# EAGLE board MPG (EAGLE 7.2.0)
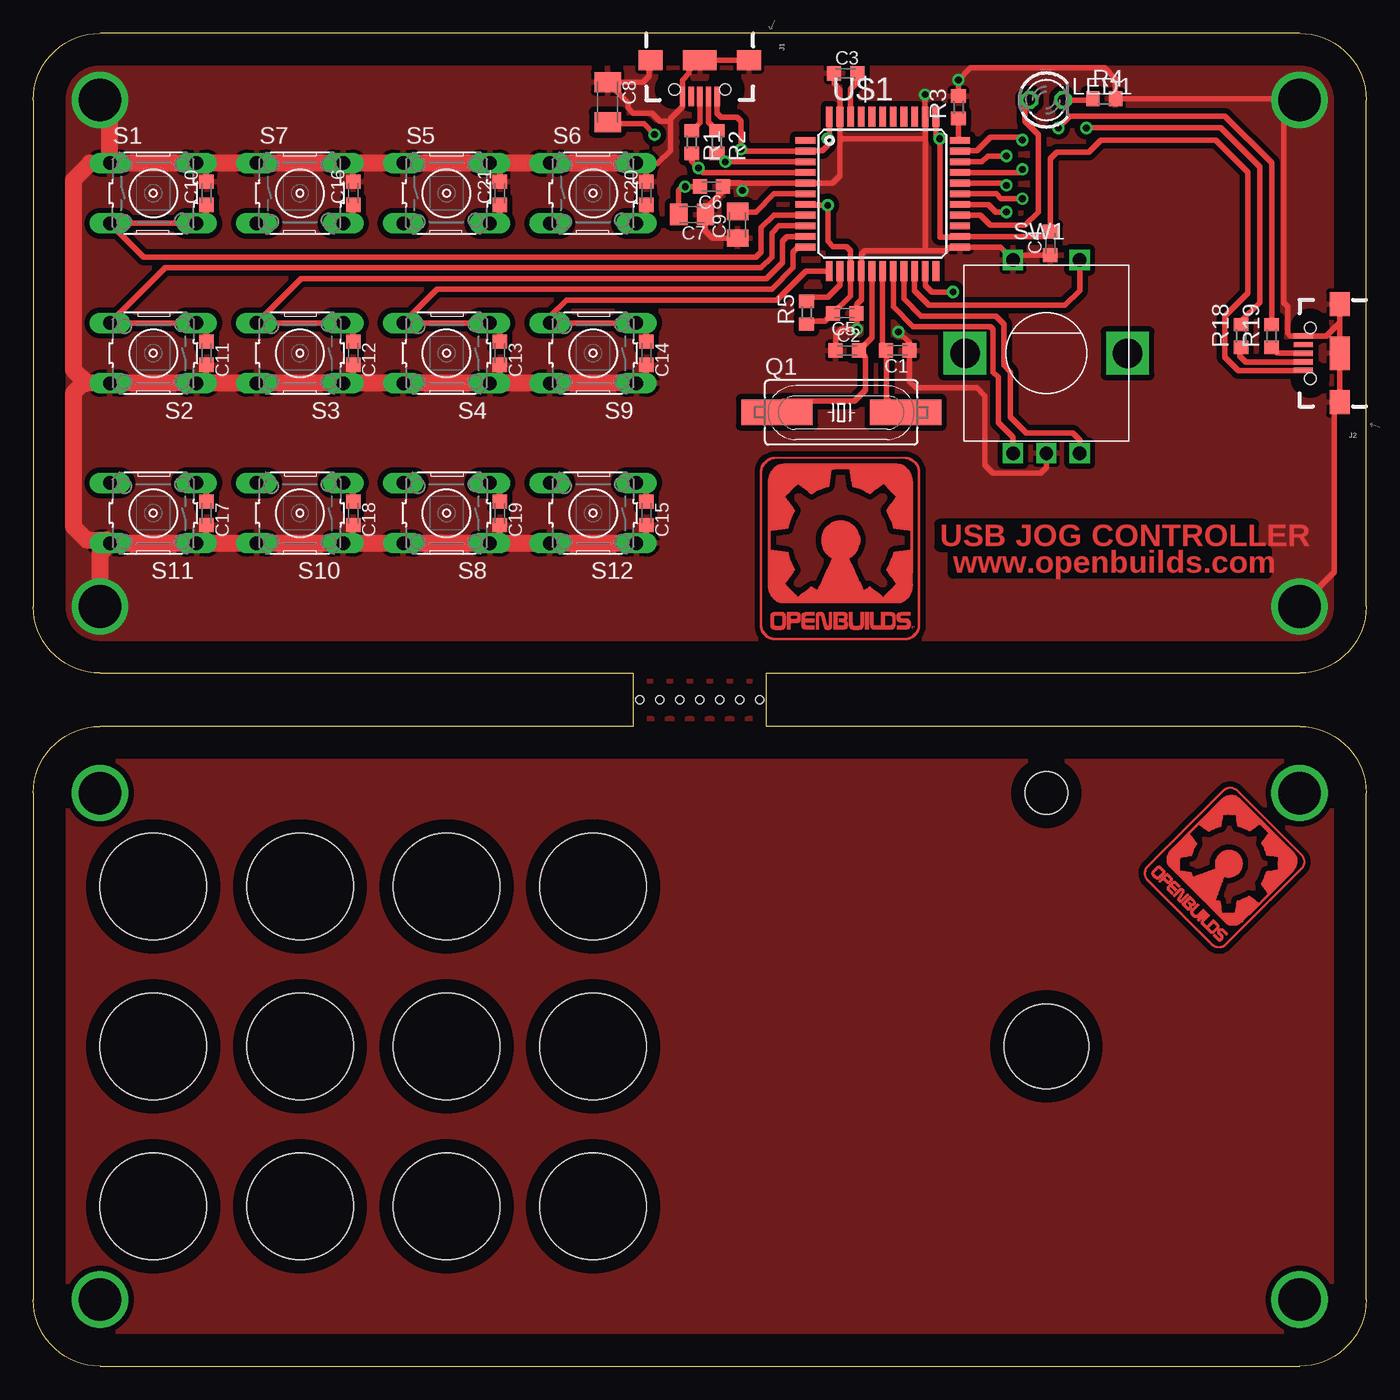
[diagram p0: board, top side]
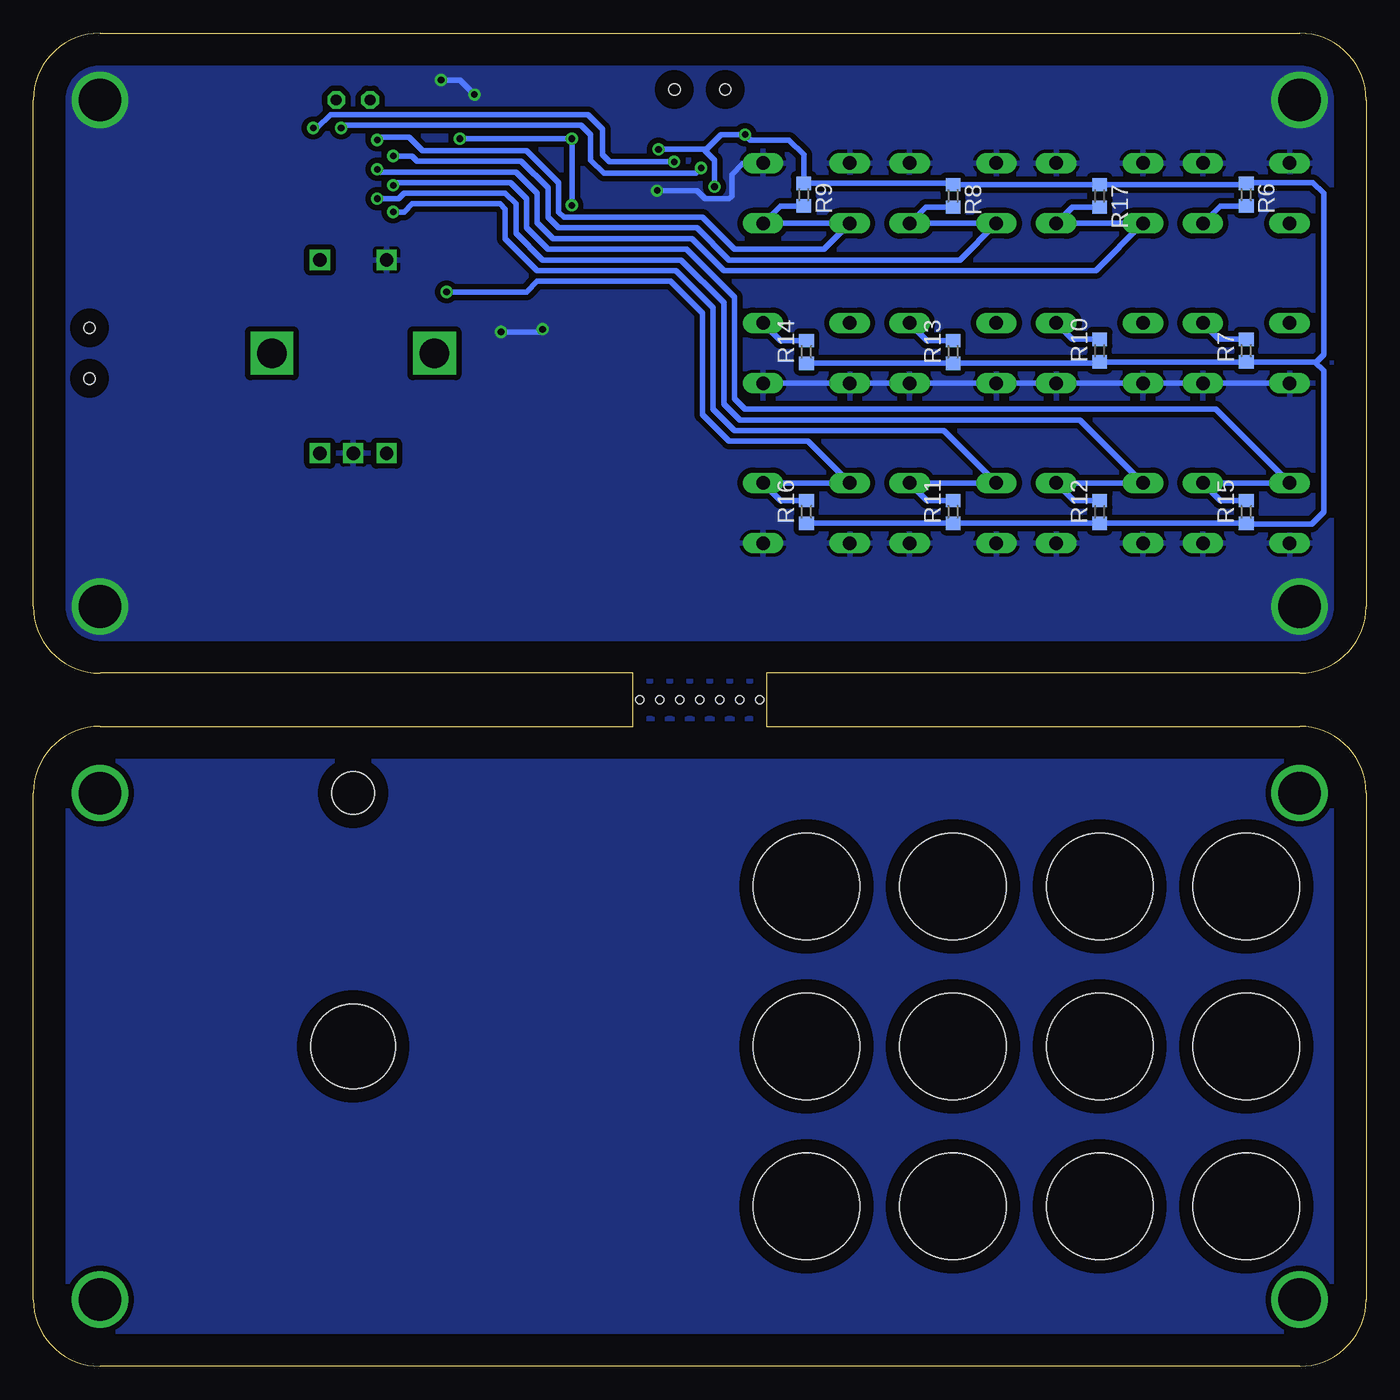
[diagram p1: board, bottom side, seen from below]

Size 100 x 100 mm. Coordinates in mm from the lower left corner, seen from the top.
Outline: 0,95 0,57 arc90 5,52 45,52 45,48 5,48 arc90 0,43 0,5 arc90 5,0 95,0 arc90 100,5 100,43 arc90 95,48 55,48 55,52 95,52 arc90 100,57 100,95 arc90 95,100 5,100 arc90 0,95
Copper layers (1*16): Top 0.035mm / dielectric 1.5mm / Bottom 0.035mm
Design rules "default": minimum track width 10mil, minimum drill 24mil, track to track 8mil, track to pad 8mil, pad to pad 8mil, via to via 8mil, smd to smd 8mil, copper to edge 40mil, drill to drill 8mil, minimum pad ring 10mil, minimum via ring 8mil, stop-mask expansion 4mil, vias tented up to drill 0mil, thermal gap 10mil
Holes 0.6 mm at 54.5,50 53,50 51.5,50 50,50 48.5,50 47,50 45.5,50
Holes 6.35 mm at 76,24
Holes 3.2 mm at 76,43
Holes 8 mm at 9,36 20,36 31,36 42,36 42,24 31,24 20,24 9,24 9,12 20,12 31,12 42,12
tKeepout: 16 lines
bKeepout: 16 lines
tRestrict: 16 lines
bRestrict: 16 lines

## Footprints (pad centres in the part's own frame; a part is rotated, then mirrored left to right if it is on the bottom)
C0603K = smd 1.05 x 1.08: 1 -0.875,0; 2 0.875,0
C0805K = smd 1.3 x 1.6: 1 -1,0; 2 1,0
C1206K = smd 1.5 x 2: 1 -1.5,0; 2 1.5,0
USB-B-MICRO-SMD_V03 = smd 1.45 x 0.4: D+ 2.725,0; D- 2.725,0.65; GND 2.725,-1.3; ID 2.725,-0.65; VBUS 2.725,1.3 | smd 1.5 x 1.8: SHIELD1 0,3.685; SHIELD2 0,-3.685 | smd 1.5 x 2.5: SHIELD3 0,0 | hole 0.85: 2.2,1.9; 2.2,-1.9
LED3MM = drill 0.813 octagon: A -1.27,0; K 1.27,0
HC49UP = smd 5.334 x 1.93: 1 -4.826,0; 2 4.826,0
R0603 = smd 1 x 1.1: 1 -0.85,0; 2 0.85,0
B3F-10XX = drill 1.016 long: 1 -3.251,2.261; 2 3.251,2.261; 3 -3.251,-2.261; 4 3.251,-2.261
ALPS_EC12E_SW = drill 1 square: A -2.5,-7.5; B 2.5,-7.5; C 0,-7.5; D -2.5,7; E 2.5,7 | drill 2.2 square: GND1 -6.1,0; GND2 6.1,0
TQFP44 = smd 1.5 x 0.5: 1 -5.8,4; 2 -5.8,3.2; 3 -5.8,2.4; 4 -5.8,1.6; 5 -5.8,0.8; 6 -5.8,0; 7 -5.8,-0.8; 8 -5.8,-1.6; 9 -5.8,-2.4; 10 -5.8,-3.2; 11 -5.8,-4; 23 5.8,-4; 24 5.8,-3.2; 25 5.8,-2.4; 26 5.8,-1.6; 27 5.8,-0.8; 28 5.8,0; 29 5.8,0.8; 30 5.8,1.6; 31 5.8,2.4; 32 5.8,3.2; 33 5.8,4 | smd 0.5 x 1.5: 12 -4,-5.8; 13 -3.2,-5.8; 14 -2.4,-5.8; 15 -1.6,-5.8; 16 -0.8,-5.8; 17 0,-5.8; 18 0.8,-5.8; 19 1.6,-5.8; 20 2.4,-5.8; 21 3.2,-5.8; 22 4,-5.8; 34 4,5.8; 35 3.2,5.8; 36 2.4,5.8; 37 1.6,5.8; 38 0.8,5.8; 39 0,5.8; 40 -0.8,5.8; 41 -1.6,5.8; 42 -2.4,5.8; 43 -3.2,5.8; 44 -4,5.8

## Placement (x,y rotation side)
C1  [C0603K]  64.84,76.21 180 top
C2  [C0603K]  61.06,76.2 0 top
C3  [C0603K]  60.95,97 0 top
C4  [C0603K]  76.3,84.24 90 top
C5  [C0603K]  60.87,79 180 top
C6  [C0603K]  50.88,88.5 180 top
C7  [C0805K]  49.43,86.41 180 top
C8  [C1206K]  43.09,94.85 270 top
C9  [C0805K]  52.84,85.63 90 top
C10  [C0603K]  13,88 90 top
C11  [C0603K]  13,76 270 top
C12  [C0603K]  24,76 270 top
C13  [C0603K]  35,76 270 top
C14  [C0603K]  46,76 270 top
C15  [C0603K]  46,64 270 top
C16  [C0603K]  24,88 90 top
C17  [C0603K]  13,64 270 top
C18  [C0603K]  24,64 270 top
C19  [C0603K]  35,64 270 top
C20  [C0603K]  46,88 90 top
C21  [C0603K]  35,88 90 top
J1  [USB-B-MICRO-SMD_V03]  50,98 270 top
J2  [USB-B-MICRO-SMD_V03]  98,76 180 top
LED1  [LED3MM]  76,95 0 top
Q1  [HC49UP]  60.62,71.56 0 top
R1  [R0603]  49.39,91.84 270 top
R2  [R0603]  51.29,91.84 270 top
R3  [R0603]  69.41,94.45 90 top
R4  [R0603]  80.34,95.09 0 top
R5  [R0603]  58.01,79.03 90 top
R6  [R0603]  9,87.9 270 bottom
R7  [R0603]  9,76.2 90 bottom
R8  [R0603]  31,87.8 270 bottom
R9  [R0603]  42.2,87.9 270 bottom
R10  [R0603]  20,76.2 90 bottom
R11  [R0603]  31,64.1 90 bottom
R12  [R0603]  20,64.1 90 bottom
R13  [R0603]  31,76.1 90 bottom
R14  [R0603]  42,76.1 90 bottom
R15  [R0603]  9,64.1 90 bottom
R16  [R0603]  42,64.1 90 bottom
R17  [R0603]  20,87.8 270 bottom
R18  [R0603]  90.6,77.3 90 top
R19  [R0603]  92.9,77.3 90 top
S1  [B3F-10XX]  9,88 0 top
S2  [B3F-10XX]  9,76 180 top
S3  [B3F-10XX]  20,76 180 top
S4  [B3F-10XX]  31,76 180 top
S5  [B3F-10XX]  31,88 0 top
S6  [B3F-10XX]  42,88 0 top
S7  [B3F-10XX]  20,88 0 top
S8  [B3F-10XX]  31,64 180 top
S9  [B3F-10XX]  42,76 180 top
S10  [B3F-10XX]  20,64 180 top
S11  [B3F-10XX]  9,64 180 top
S12  [B3F-10XX]  42,64 180 top
SW1  EC12E_SW  [ALPS_EC12E_SW]  76,76 0 top
U$1  ATMEGA32U4-AU  [TQFP44]  63.72,87.96 0 top

## Library data of the parts
C1-C6 C8 C10-C21 R1-R19 U$1 = adafruit
C7 C9 = rcl
J1 J2 = SparkFun-Connectors; PROD_ID: CONN-11752
LED1 = led
Q1 = adafruit; OC_FARNELL: unknown; OC_NEWARK: unknown
S1-S12 = switch-omron; MPN: B3F-1000; OC_FARNELL: 176432; OC_NEWARK: 36M3542
SW1 = switch-alps; MPN: EC12E2424407; OC_FARNELL: 1520813; OC_NEWARK: 74M1068

## Nets
D0: C10.1 R6.2 S1.3 S1.4 U$1.8
D1: C11.1 R7.2 S2.3 S2.4 U$1.9
D2: C12.1 R10.2 S3.3 S3.4 U$1.10
D3: C13.1 R13.2 S4.3 S4.4 U$1.11
D4PWM: C14.1 R14.2 S9.3 S9.4 U$1.12
D5PWM: SW1.A U$1.18
D6: SW1.B U$1.19
D7: SW1.E U$1.20
D8: C15.1 R16.2 S12.3 S12.4 U$1.21
D9PWM: C21.1 R8.2 S5.3 S5.4 U$1.31
D10PWM: C20.1 R9.2 S6.3 S6.4 U$1.32
D11: LED1.A U$1.26
D12: C19.1 R11.2 S8.3 S8.4 U$1.27
D13: C18.1 R12.2 S10.3 S10.4 U$1.28
D14: C17.1 R15.2 S11.3 S11.4 U$1.29
D15: C16.1 R17.2 S7.3 S7.4 U$1.30
D16: U$1.36
D17: U$1.37
D18: U$1.38
D19: U$1.39
D20: U$1.40
D21: U$1.41
D22: U$1.25
D23: U$1.22
D24: U$1.1
GND: C1.1 C2.1 C3.1 C4.1 C5.1 C6.1 C7.1 C8.1 C9.1 C10.2 C11.2 C12.2 C13.2 C14.2 C15.2 C16.2 C17.2 C18.2 C19.2 C20.2 C21.2 J1.GND J1.SHIELD1 J1.SHIELD2 J1.SHIELD3 J2.GND J2.SHIELD1 J2.SHIELD2 J2.SHIELD3 R3.2 R4.2 S1.1 S1.2 S2.1 S2.2 S3.1 S3.2 S4.1 S4.2 S5.1 S5.2 S6.1 S6.2 S7.1 S7.2 S8.1 S8.2 S9.1 S9.2 S10.1 S10.2 S11.1 S11.2 S12.1 S12.2 SW1.C SW1.D U$1.5 U$1.15 U$1.23 U$1.35 U$1.43
N$1: R1.2 R19.2 U$1.4
N$2: R2.2 R18.2 U$1.3
N$3: R3.1 U$1.33
N$7: C2.2 Q1.1 U$1.16
N$8: C1.2 Q1.2 U$1.17
N$9: R5.2 U$1.13
N$10: C3.2 U$1.42
N$11: C9.2 U$1.6
N$12: LED1.K R4.1
USBD+L: J2.D+ R19.1
USBD+T: J1.D+ R1.1
USBD-L: J2.D- R18.1
USBD-T: J1.D- R2.1
VCC: C4.2 C5.2 C6.2 C7.2 C8.2 J1.VBUS J2.VBUS R5.1 R6.1 R7.1 R8.1 R9.1 R10.1 R11.1 R12.1 R13.1 R14.1 R15.1 R16.1 R17.1 U$1.2 U$1.7 U$1.14 U$1.24 U$1.34 U$1.44

## Tracks (layer width: path | path; a pad name or v marks a point on that pad's centre or on a via)
D0
  Top 0.406: U$1.8 55.56,86.36 54.6,85.4 54.6,83.6 54.2,83.2 8.29,83.2 S1.3 S1.4 13,86.49 C10.1
  Bottom 0.406: R6.2 10.94,87.05 S1.4
D1
  Top 0.406: U$1.9 55.96,85.56 55.4,85 55.4,83.2 54.6,82.4 9.89,82.4 S2.4 S2.3 13,77.51 C11.1
  Bottom 0.406: R7.2 11.04,77.05 S2.3
D2
  Top 0.406: U$1.10 56.56,84.76 56.2,84.4 56.2,82.8 55,81.6 20.09,81.6 S3.4 S3.3 24,77.51 C12.1
  Bottom 0.406: R10.2 22.04,77.05 S3.3
D3
  Top 0.406: U$1.11 57.36,83.96 57,83.6 57,82.4 55.4,80.8 30.29,80.8 S4.4 S4.3 35,77.51 C13.1
  Bottom 0.406: R13.2 32.94,76.95 S4.3
D4PWM
  Top 0.406: U$1.12 57.96,82.16 55.8,80 40,80 38.75,78.75 S9.4 S9.3 46,77.51 C14.1
  Bottom 0.406: R14.2 43.94,76.95 S9.3
D5PWM
  Top 0.406: SW1.A 73.5,69.7 72.4,70.8 72.4,74.2 72,74.6 72,77.8 71.8,78 66,78 64.52,79.48 U$1.18
D6
  Top 0.406: SW1.B 78.5,69.5 78,70 74.5,70 73.3,71.2 73.3,74.6 72.8,75.1 72.8,78.2 72.2,78.8 66.6,78.8 65.32,80.08 U$1.19
D7
  Top 0.406: U$1.20 66.12,80.68 67.2,79.6 77.4,79.6 78.5,80.7 SW1.E
D8  (via drill 0.5)
  Top 0.406: U$1.21 66.92,81.08 67.4,80.6 v69,80.6 | C15.1 46,65.51 S12.3
  Bottom 0.406: v69,80.6 63,80.6 62.2,81.4 52.2,81.4 49.8,79 49.8,71.4 47.8,69.4 41.89,69.4 S12.4 S12.3 43.94,64.95 R16.2
D9PWM  (via drill 0.5)
  Top 0.406: U$1.31 71.16,90.36 71.6,90.8 v73,90.8 | C21.1 35,86.49 S5.4
  Bottom 0.406: v73,90.8 71.6,90.8 71.2,90.4 63.4,90.4 61.4,88.4 61.4,86.2 60.6,85.4 50.2,85.4 47.8,83 30.49,83 S5.3 S5.4 33.04,86.95 R8.2
D10PWM  (via drill 0.5)
  Top 0.406: U$1.32 69.56,91.2 70.8,91.2 71.8,92.2 74,92.2 v74.2,92 | C20.1 46,86.49 S6.4
  Bottom 0.406: v74.2,92 74,92.2 71.8,92.2 70.8,91.2 63,91.2 60.6,88.8 60.6,86.6 60.2,86.2 49.8,86.2 47.4,83.8 40.69,83.8 S6.3 S6.4 43.94,87.05 R9.2
D11
  Top 0.406: U$1.26 71.04,86.36 71.8,85.6 74.4,85.6 75.4,86.6 75.4,92.4 74.4,93.4 74.4,94.67 LED1.A
D12  (via drill 0.5)
  Top 0.406: U$1.27 71.64,87.16 72.2,86.6 v73,86.6 | C19.1 35,65.51 S8.3
  Bottom 0.406: v73,86.6 72.2,86.6 71.6,87.2 65,87.2 64.6,86.8 64.6,84.6 62.2,82.2 51.8,82.2 49,79.4 49,71.8 47.4,70.2 31.69,70.2 S8.4 S8.3 32.94,64.95 R11.2
D13  (via drill 0.5)
  Top 0.406: U$1.28 72.24,87.96 72.6,87.6 v74.2,87.6 | C18.1 24,65.51 S10.3
  Bottom 0.406: v74.2,87.6 72.6,87.6 72.2,88 64.6,88 63.8,87.2 63.8,85 61.8,83 51.4,83 48.2,79.8 48.2,72.2 47,71 21.49,71 S10.4 S10.3 21.94,64.95 R12.2
D14  (via drill 0.5)
  Top 0.406: U$1.29 72.84,88.76 v73,88.6 | C17.1 13,65.51 S11.3
  Bottom 0.406: v73,88.6 72.8,88.8 64.2,88.8 63,87.6 63,85.4 61.4,83.8 51,83.8 47.4,80.2 47.4,72.6 46.6,71.8 11.29,71.8 S11.4 S11.3 10.94,64.95 R15.2
D15  (via drill 0.5)
  Top 0.406: U$1.30 73.96,89.56 v74.2,89.8 | C16.1 24,86.49 S7.4
  Bottom 0.406: v74.2,89.8 74,89.6 63.8,89.6 62.2,88 62.2,85.8 61,84.6 50.6,84.6 48.2,82.2 20.29,82.2 S7.3 S7.4 22.04,86.95 R17.2
GND  (via drill 0.5, 3.2 pad 4)
  Top 0.406: 60.52,91.9 U$1.43 60.52,95.78 60.1,96.2 60.1,96.97 C3.1 | 60.52,91.9 60.52,89.32 59.96,88.76 U$1.5 52.02,88.76 C6.1 51.6,88.34 | 66.92,92.32 U$1.35 66.9,93.78 v66.9,95.4 | 66.92,92.32 66.9,92.1 60.72,92.1 60.52,91.9 | 66.92,92.32 66.92,83.78 66.9,83.7 | 66.9,83.7 68.5,83.7 68.7,83.9 69.46,83.9 U$1.23 72.54,83.96 SW1.D 73.86,83.36 C4.1 | 66.9,83.7 62.4,83.7 62.12,83.42 U$1.15 62.12,80.02 61.8,79.7 61.8,79.06 C5.1 61.8,78.94 v61.8,77.8 60.6,77.8 60.2,77.4 60.2,76.22 C2.1 | v64.9,77.6 65.72,76.78 C1.1 65.72,73.89 66.2,73.4 70.8,73.4 71.4,72.8 71.4,67.6 72,67 75.6,67 76,67.4 SW1.C | R3.2 v69.4,96.5 70.3,97.4 80.4,97.4 81.19,96.61 R4.2 94.91,95.09 v95,95 93.8,93.8 93.8,79.8 94.1,79.5 94.1,77.5 94.3,77.3 J2.GND 97,77.3 98,78.3 | 51.6,88.34 51.6,88 50.43,86.83 C7.1 50.4,86.38 50.4,85.2 50.97,84.63 C9.1 52.81,84.6 | 4,73.74 3.74,73.74 | 5.49,62 S11.2 | 47.8,93.4 47.8,93.6 48.7,94.5 J1.GND 48.7,96.5 49.2,97 49.2,97.2 J1.SHIELD3 J1.SHIELD1 | 47.8,93.4 47.8,91.2 46.8,90.2 45.31,90.2 S6.2 46,89.51 C20.2 | 47.8,93.4 47,93.4 46.4,94 45,94 44.6,94.4 44.6,94.8 43.09,96.31 C8.1 45.75,96.35 46.2,96.8 46.2,97.89 J1.SHIELD2 | 51.6,88.34 51.6,88.4 52,88.8 53,88.8 53,88.6 53.2,88.4 v53.2,88.2 | C10.2 13,89.51 S1.2 | C16.2 24,89.51 S7.2 | C21.2 35,89.51 S5.2 | C14.2 46,74.49 S9.1 | C13.2 35,74.49 S4.1 | C12.2 24,74.49 S3.1 | C11.2 13,74.49 S2.1 | C17.2 13,62.49 S11.1 | C18.2 24,62.49 S10.1 | C19.2 35,62.49 S8.1 | C15.2 46,62.49 S12.1 | 98,78.3 J2.SHIELD2 | 98,78.3 J2.SHIELD3 J2.SHIELD1 98,72 97.6,71.6 97.6,59.6 v95,57
  Top 1.27: S12.1 S12.2 S8.1 S8.2 S10.1 S10.2 S11.1 S11.2 5,60.99 v5,57 | S6.2 S6.1 S5.2 S5.1 S7.2 S7.1 S1.2 S1.1 | S1.1 v5.75,94.25 | S9.1 4,73.74 3,74.74 3,89 4.26,90.26 S1.1 | 3.74,73.74 3,73 3,63 4,62 5.49,62
  Bottom 0.406: v64.9,77.6 62,77.6 v61.8,77.8 | v69.4,96.5 68,96.5 v66.9,95.4 | S9.1 S9.2 S4.1 S4.2 S3.1 S3.2 S2.1 S2.2 | v53.2,88.2 50.2,88.2 49.6,87.6 47.8,87.6 47.6,87.8 47.6,89.4 46.8,90.2 45.31,90.2 S6.2
  Bottom 1.27: v5.75,94.25 v5,95
  pour Top (isolate 0.406): 1,96 4,99 96,99 99,96 99,56 96,53 55,53 55,47 96,47 99,44 99,4 96,1 4,1 1,4 1,44 4,47 45,47 45,53 4,53 1,56
  pour Bottom (isolate 0.406): 1,96 4,99 96,99 99,96 99,56 96,53 55,53 55,47 96,47 99,44 99,4 96,1 4,1 1,4 1,44 4,47 45,47 45,53 4,53 1,56
N$1  (via drill 0.5)
  Top 0.406: R1.2 49.39,90.41 v49.9,89.9 50.24,89.56 U$1.4 | R19.2 92.9,90.3 89.4,93.8 77.8,93.8 v76.9,92.9
  Bottom 0.406: v49.9,89.9 50.3,89.5 57.2,89.5 58.2,90.5 58.2,92.4 58.9,93.1 76.7,93.1 v76.9,92.9
N$2  (via drill 0.5)
  Top 0.406: U$1.3 v51.92,90.36 R2.2 | R18.2 90.6,78.4 92,79.8 92,90 89.1,92.9 v79,92.9
  Bottom 0.406: v51.92,90.36 56.76,90.36 57.3,90.9 57.3,92.8 58.4,93.9 77.7,93.9 78.7,92.9 v79,92.9
N$3
  Top 0.406: 69.76,91.96 U$1.33 69.41,92.07 R3.1
N$7
  Top 0.406: Q1.1 56.23,72.4 61.6,72.4 62.44,73.23 62.44,75.7 C2.2 62.92,77.19 U$1.16
N$8
  Top 0.406: Q1.2 64.97,71.64 64.56,72.04 64,72.6 64,76.17 C1.2 63.72,76.45 U$1.17
N$9
  Top 0.406: U$1.13 60.52,81.12 59.6,80.2 58.33,80.2 R5.2
N$10
  Top 0.406: U$1.42 61.32,95.82 61.7,96.2 61.7,96.88 C3.2
N$11
  Top 0.406: U$1.6 55.56,87.96 54.2,86.6 52.87,86.6 C9.2
N$12
  Top 0.406: LED1.K 79.4,95 R4.1
N$14  (via drill 3.2 pad 4)
  other vias: 5,43
N$15  (via drill 3.2 pad 4)
  other vias: 5,5
N$16  (via drill 3.2 pad 4)
  other vias: 95,5
N$17  (via drill 3.2 pad 4)
  other vias: 95,43
USBD+L
  Top 0.406: J2.D+ 93.35,76 R19.1
USBD+T
  Top 0.406: J1.D+ 50,93.3 R1.1
USBD-L
  Top 0.406: J2.D- 90.95,75.35 90.5,75.8 90.5,76.35 R18.1
USBD-T
  Top 0.406: J1.D- 50.65,93.33 R2.1
VCC  (via drill 0.5)
  Top 0.406: U$1.7 57.98,87.1 v59.6,87.1 59.6,84.4 60,84 61,84 61.3,83.7 61.32,83.12 U$1.14 61.3,82.14 61.3,80.3 C5.2 59.4,78.4 58.23,78.4 R5.1 | U$1.34 67.72,92.32 v68,92.1 68,84.7 69.46,84.7 U$1.24 75.94,84.76 C4.2 76.3,90.6 76.8,91.1 79.2,91.1 80.1,92 88.7,92 91.1,89.6 91.1,80.5 89.4,78.8 89.4,75.7 90.4,74.7 J2.VBUS | U$1.44 59.72,92.22 v59.6,92.1 59.6,91.6 59.2,91.2 57.96,91.2 U$1.2 53.24,91.16 v53.1,91.3 53.1,93.4 52.8,93.7 51.6,93.7 51.3,94 J1.VBUS | v48.9,88.5 C6.2 48.7,88.5 48.4,88.2 48.4,86.44 C7.2 | C8.2 43.05,93.35 43.4,93.2 45.8,93.2 v46.6,92.4
  Bottom 0.406: v59.6,87.1 v59.6,92.1 v68,92.1 | v53.1,91.3 49.7,91.3 49.6,91.2 | 49.6,91.2 48.9,90.5 v48.9,88.5 | 49.6,91.2 48.4,92.4 v46.6,92.4 46.2,92 43.3,92 42.2,90.9 R9.1 31.1,88.75 R8.1 R17.1 9.1,88.65 R6.1 8.95,88.8 4,88.8 3.2,88 3.2,75.9 3.75,75.35 3.85,75.35 | R14.1 R13.1 20.1,75.25 R10.1 R7.1 3.85,75.35 | R16.1 R11.1 R12.1 R15.1 8.95,63.2 4.1,63.2 3.2,64.1 3.2,74.7 3.85,75.35
(copper drawn outside any net)
  shapes: Top area x4087

## Text on the board
Top: USB JOG CONTROLLER | www.openbuilds.com
tStop: USB JOG CONTROLLER | www.openbuilds.com
OPHWSILK: 104 | 106 | 104 | + | D11 | 1K | 22R | 22R | D0 | D15 | D9 | D10 | 104 | 104 | 105 | 105 | D7 | D1 | D2 | D3 | D4 | 22R | 22R | 1K | 104 | 18p | 18p | D14 | D13 | D12 | D8 | D5 | D6